# EAGLE board Display (EAGLE 6.5.0)
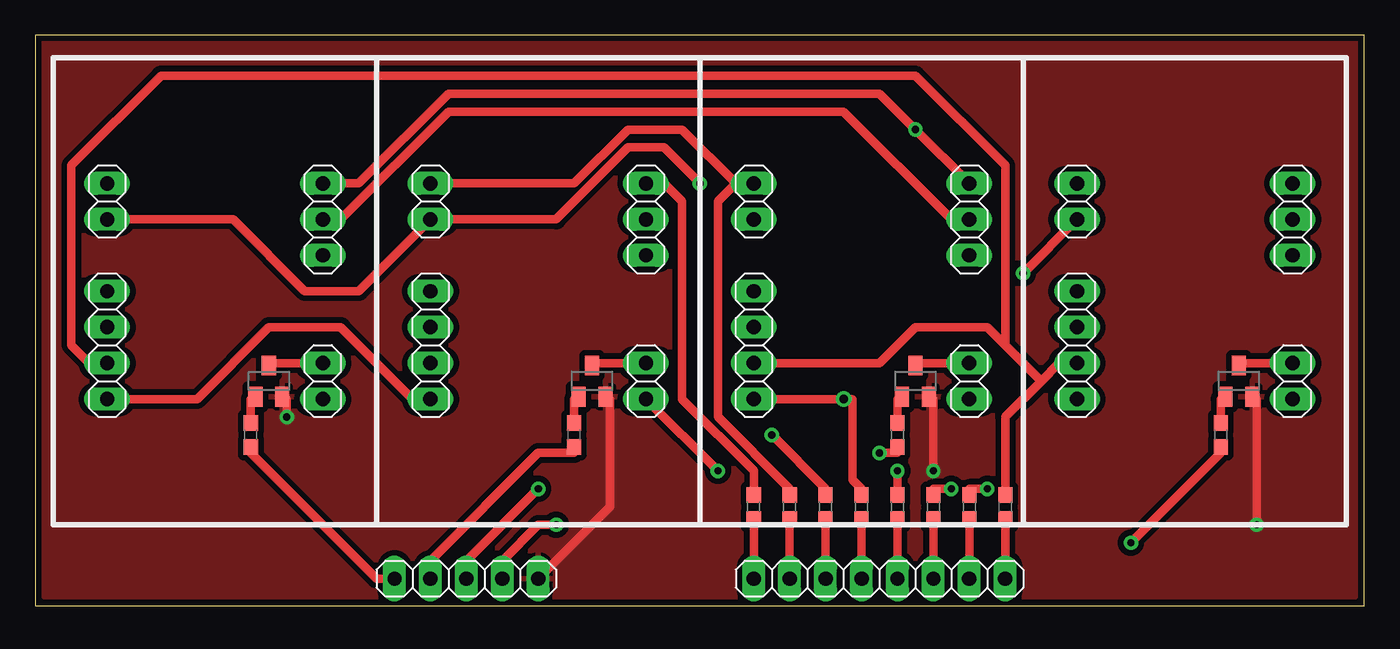
[diagram p0: board, top side]
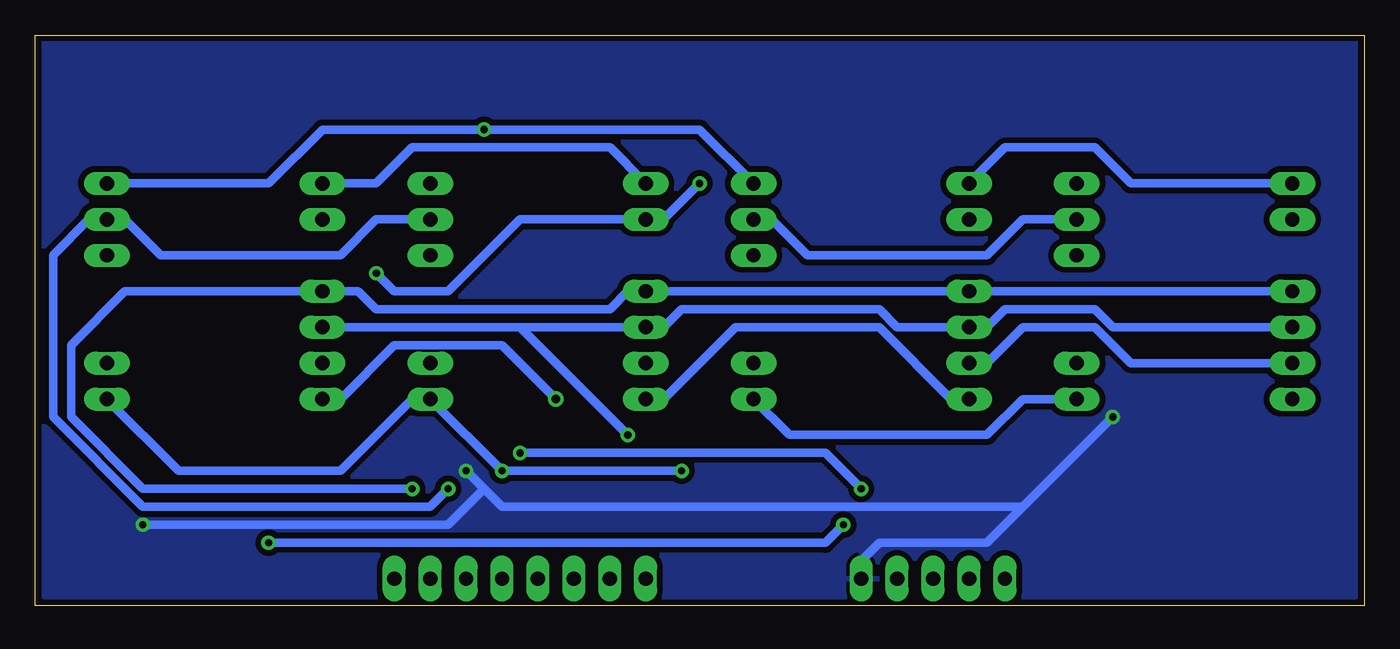
[diagram p1: board, bottom side, seen from below]

Size 93.96 x 40.31 mm. Coordinates in mm from the lower left corner, seen from the top.
Outline: 0,0 93.96,0 93.96,40.31 0,40.31 0,0
Copper layers (1*16): Top 0.035mm / dielectric 1.5mm / Bottom 0.035mm
Design rules "default": minimum track width 8mil, minimum drill 20mil, track to track 8mil, track to pad 8mil, pad to pad 8mil, via to via 8mil, smd to smd 8mil, copper to edge 10mil, drill to drill 8mil, minimum pad ring 12mil, minimum via ring 10mil, stop-mask expansion 4mil, vias tented up to drill 25mil, thermal gap 10mil

## Footprints (pad centres in the part's own frame; a part is rotated, then mirrored left to right if it is on the bottom)
1X02 = drill 1.016 long: 1 -1.27,0; 2 1.27,0
1X03 = drill 1.016 long: 1 -2.54,0; 2 0,0; 3 2.54,0
1X04 = drill 1.016 long: 1 -3.81,0; 2 -1.27,0; 3 1.27,0; 4 3.81,0
1X08 = drill 1.016 long: 1 -8.89,0; 2 -6.35,0; 3 -3.81,0; 4 -1.27,0; 5 1.27,0; 6 3.81,0; 7 6.35,0; 8 8.89,0
0603 = smd 1.1 x 1: 1 -0.85,0; 2 0.85,0
SOT23 = smd 1 x 1.4: 1 -0.95,-1.1; 2 0.95,-1.1; 3 0,1.1
1X05 = drill 1.016 long: 1 -5.08,0; 2 -2.54,0; 3 0,0; 4 2.54,0; 5 5.08,0

## Placement (x,y rotation side)
E$1  [1X02]  20.32,15.88 90 top
E$2  [1X03]  20.32,27.3 90 top
E$3  [1X02]  5.08,28.57 90 top
E$4  [1X04]  5.08,18.41 90 top
E$5  [1X02]  43.18,15.88 90 top
E$6  [1X03]  43.18,27.3 90 top
E$7  [1X02]  27.94,28.57 90 top
E$8  [1X04]  27.94,18.41 90 top
E$9  [1X02]  66.04,15.88 90 top
E$10  [1X03]  66.04,27.3 90 top
E$11  [1X02]  50.8,28.57 90 top
E$12  [1X04]  50.8,18.41 90 top
E$13  [1X02]  88.9,15.88 90 top
E$14  [1X03]  88.9,27.3 90 top
E$15  [1X02]  73.66,28.57 90 top
E$16  [1X04]  73.66,18.41 90 top
E$17  [1X08]  59.69,1.91 0 top
E$18  [0603]  15.24,12.06 90 top
E$19  [0603]  50.8,6.99 90 top
E$20  [0603]  53.34,6.99 90 top
E$21  [0603]  55.88,6.99 90 top
E$22  [0603]  58.42,6.99 90 top
E$23  [0603]  60.96,6.99 90 top
E$24  [0603]  63.5,6.99 90 top
E$25  [0603]  66.04,6.99 90 top
E$26  [0603]  68.58,6.99 90 top
E$27  [SOT23]  16.51,15.88 0 top
E$28  [SOT23]  39.37,15.88 0 top
E$29  [SOT23]  62.23,15.88 0 top
E$30  [SOT23]  85.09,15.88 0 top
E$31  [1X05]  30.48,1.91 0 top
E$32  [0603]  38.1,12.06 270 top
E$33  [0603]  60.96,12.06 270 top
E$34  [0603]  83.82,12.06 90 top

## Library data of the parts
E$1-E$17 E$31 = pinhead
E$18-E$26 E$32-E$34 = SparkFun
E$27-E$30 = ref-packages

## Nets
GND: E$27.2 E$28.2 E$29.2 E$30.2 E$31.5
S$1: E$2.3 E$6.3 E$10.3 E$14.3 E$19.2
S$2: E$3.2 E$7.2 E$11.2 E$15.2 E$20.2
S$3: E$3.1 E$7.1 E$11.1 E$15.1
S$4: E$2.2 E$6.2 E$10.2 E$14.2 E$24.2
S$5: E$4.4 E$8.4 E$12.4 E$16.4 E$25.2
S$6: E$4.3 E$8.3 E$12.3 E$16.3 E$21.2
S$7: E$1.1 E$5.1 E$9.1 E$13.1 E$23.2
S$8: E$4.1 E$8.1 E$12.1 E$16.1 E$22.2
S$9: E$4.2 E$8.2 E$12.2 E$16.2 E$26.2
S$10: E$17.1 E$19.1
S$11: E$17.2 E$20.1
S$12: E$17.3 E$21.1
S$13: E$17.4 E$22.1
S$14: E$17.5 E$23.1
S$15: E$17.6 E$24.1
S$16: E$17.7 E$25.1
S$17: E$17.8 E$26.1
S$18: E$1.2 E$27.3
S$19: E$5.2 E$28.3
S$20: E$9.2 E$29.3
S$21: E$13.2 E$30.3
S$22: E$18.1 E$31.1
S$23: E$18.2 E$27.1
S$24: E$31.2 E$32.2
S$25: E$28.1 E$32.1
S$26: E$29.1 E$33.1
S$27: E$30.1 E$34.2
S$28: E$31.3 E$33.2
S$29: E$31.4 E$34.1

## Tracks (layer width: path | path; a pad name or v marks a point on that pad's centre or on a via)
GND  (via drill 0.51)
  Top 0.61: v17.78,13.34 17.78,14.61 E$27.2 | E$31.5 40.64,6.99 40.64,14.61 E$28.2 | v63.5,9.53 63.5,14.61 E$29.2 | v86.36,5.71 86.36,14.61 E$30.2
  Bottom 0.61: 24.13,6.99 26.67,4.45 34.29,4.45 35.56,3.17 E$31.5 | 24.13,6.99 v17.78,13.34 | 62.23,8.26 60.96,6.99 24.13,6.99 | 62.23,8.26 v63.5,9.53 | v86.36,5.71 64.77,5.71 62.23,8.26
  pour Top (isolate 0.406): 0.64,40.01 93.34,40.01 93.34,0.64 0.64,0.64
  pour Bottom (isolate 0.406): 0.64,40.01 93.34,40.01 93.34,0.64 0.64,0.64
S$1  (via drill 0.51)
  Top 0.61: E$2.3 22.86,29.84 29.21,36.2 59.69,36.2 v62.23,33.66 E$10.3 | E$19.2 50.8,9.53 45.72,14.61 45.72,28.57 44.45,29.84 E$6.3
  Bottom 0.61: E$14.3 77.47,29.84 73.66,33.66 v62.23,33.66 46.99,33.66 E$6.3
S$2
  Top 0.61: 49.53,29.84 48.26,28.57 48.26,13.34 53.34,8.26 E$20.2 | E$7.2 38.1,29.84 41.91,33.66 45.72,33.66 49.53,29.84 | 49.53,29.84 E$11.2
  Bottom 0.61: E$3.2 16.51,29.84 19.05,32.39 25.4,32.39 E$7.2 | E$15.2 69.85,29.84 67.31,32.39 53.34,32.39 E$11.2
S$3  (via drill 0.51)
  Top 0.61: E$3.1 13.97,27.3 19.05,22.22 22.86,22.22 E$7.1 36.83,27.3 41.91,32.39 44.45,32.39 v46.99,29.84 | E$15.1 v69.85,23.49
  Bottom 0.61: v69.85,23.49 68.58,22.22 64.77,22.22 59.69,27.3 E$11.1 49.53,27.3 v46.99,29.84
S$4  (via drill 0.51)
  Top 0.61: v64.77,8.26 63.5,8.26 E$24.2 | E$2.2 21.59,27.3 29.21,34.93 57.15,34.93 64.77,27.3 E$10.2
  Bottom 0.61: E$2.2 24.13,27.3 26.67,24.76 39.37,24.76 41.91,27.3 E$6.2 | v64.77,8.26 66.04,6.99 86.36,6.99 92.71,13.34 92.71,24.76 90.17,27.3 E$14.2 87.63,27.3 85.09,24.76 72.39,24.76 69.85,27.3 E$10.2
S$5  (via drill 0.51)
  Top 0.61: v67.31,8.26 66.04,8.26 E$25.2
  Bottom 0.61: v67.31,8.26 86.36,8.26 91.44,13.34 91.44,18.41 87.63,22.22 E$16.4 71.12,22.22 69.85,20.95 53.34,20.95 52.07,22.22 E$12.4 E$8.4 E$4.4
S$6  (via drill 0.51)
  Top 0.61: v52.07,12.06 55.88,8.26 E$21.2
  Bottom 0.61: E$4.3 17.78,19.68 19.05,20.95 25.4,20.95 26.67,19.68 E$8.3 33.02,19.68 34.29,20.95 48.26,20.95 49.53,19.68 E$12.3 59.69,19.68 | 59.69,19.68 v52.07,12.06 | E$16.3 59.69,19.68
S$7  (via drill 0.51)
  Top 0.61: v60.96,9.53 E$23.2 | v48.26,9.53 E$5.1
  Bottom 0.61: E$1.1 24.13,14.61 26.67,12.06 40.64,12.06 E$5.1 | v48.26,9.53 v60.96,9.53 E$9.1 67.31,14.61 72.39,9.53 83.82,9.53 E$13.1
S$8  (via drill 0.6)
  Top 0.61: E$22.2 58.42,8.26 57.78,8.89 57.78,14.61 v57.15,14.61 E$12.1 | E$4.1 11.43,14.61 16.51,19.68 21.59,19.68 26.67,14.61 E$8.1
  Bottom 0.61: E$12.1 49.53,14.61 44.45,19.68 34.29,19.68 29.21,14.61 E$8.1 | v57.15,14.61 60.96,18.41 68.58,18.41 72.39,14.61 E$16.1
S$9
  Top 0.61: E$26.2 68.58,13.34 71.12,15.88 | 71.12,15.88 72.39,17.14 E$16.2 | E$12.2 59.69,17.14 62.23,19.68 67.31,19.68 68.58,18.41 | 71.12,15.88 68.58,18.41 | E$4.2 3.81,17.14 2.54,18.41 2.54,31.11 8.89,37.47 62.23,37.47 68.58,31.11 68.58,18.41
  Bottom 0.61: E$4.2 16.51,17.14 19.05,19.68 24.13,19.68 26.67,17.14 E$8.2
S$10
  Top 0.61: E$17.1 E$19.1
S$11
  Top 0.61: E$17.2 E$20.1
S$12
  Top 0.61: E$17.3 E$21.1
S$13
  Top 0.61: E$17.4 E$22.1
S$14
  Top 0.61: E$17.5 E$23.1
S$15
  Top 0.61: E$17.6 E$24.1
S$16
  Top 0.61: E$17.7 E$25.1
S$17
  Top 0.61: E$17.8 E$26.1
S$18
  Top 0.61: E$1.2 16.51,17.14 E$27.3
S$19
  Top 0.61: E$5.2 39.37,17.14 E$28.3
S$20
  Top 0.61: E$9.2 62.23,17.14 E$29.3
S$21
  Top 0.61: E$13.2 85.09,17.14 E$30.3
S$22
  Top 0.61: E$31.1 24.13,1.91 15.24,10.79 E$18.1
S$23
  Top 0.61: E$18.2 15.24,14.61 E$27.1
S$24
  Top 0.61: E$31.2 27.94,3.17 35.56,10.79 38.1,10.79 E$32.2
S$25
  Top 0.61: E$32.1 38.1,14.61 E$28.1
S$26
  Top 0.61: E$33.1 60.96,14.61 E$29.1
S$27
  Top 0.61: E$34.2 83.82,14.61 E$30.1
S$28  (via drill 0.51)
  Top 0.61: v59.69,10.79 60.96,10.79 E$33.2 | v35.56,8.26 30.48,3.17 E$31.3
  Bottom 0.61: v59.69,10.79 38.1,10.79 v35.56,8.26
S$29  (via drill 0.51)
  Top 0.61: v77.47,4.45 83.82,10.79 E$34.1 | v36.83,5.71 35.56,5.71 33.02,3.17 E$31.4
  Bottom 0.61: v77.47,4.45 38.1,4.45 v36.83,5.71

## Text on the board
tDocu: WARMWIT | DISP4 | DISP3 | DISP2 | DISP1 | BIERTJE?